# Altium PCB PCB2.PcbDoc
Units mil, origin at the board's own origin, x right, y up, seen from the top; angles counter-clockwise.
Board outline 3140 x 2285 mil, 2 copper layers (Top Layer, Bottom Layer); 24 components, 19 nets, 113 pads, 7 vias.
Unrouted connection lines stored in the file: 1.
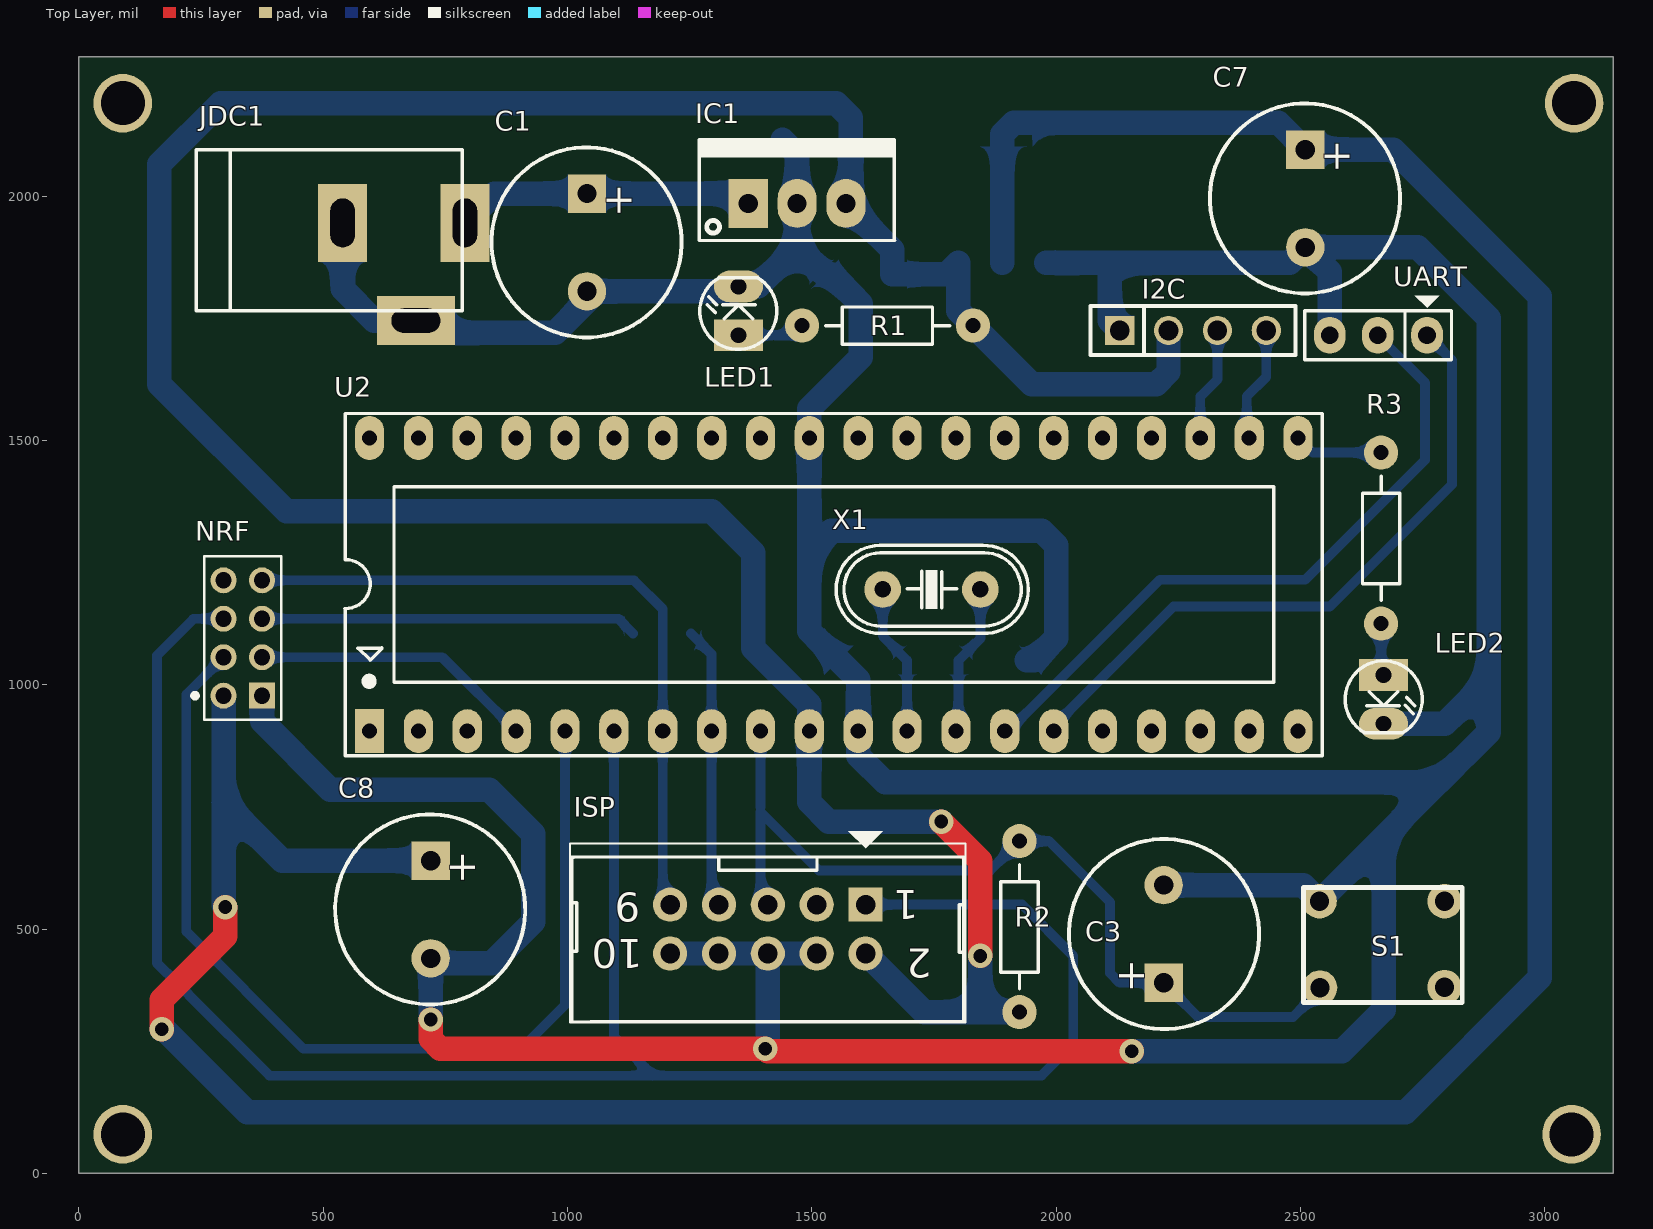
[diagram p0: Top Layer view]
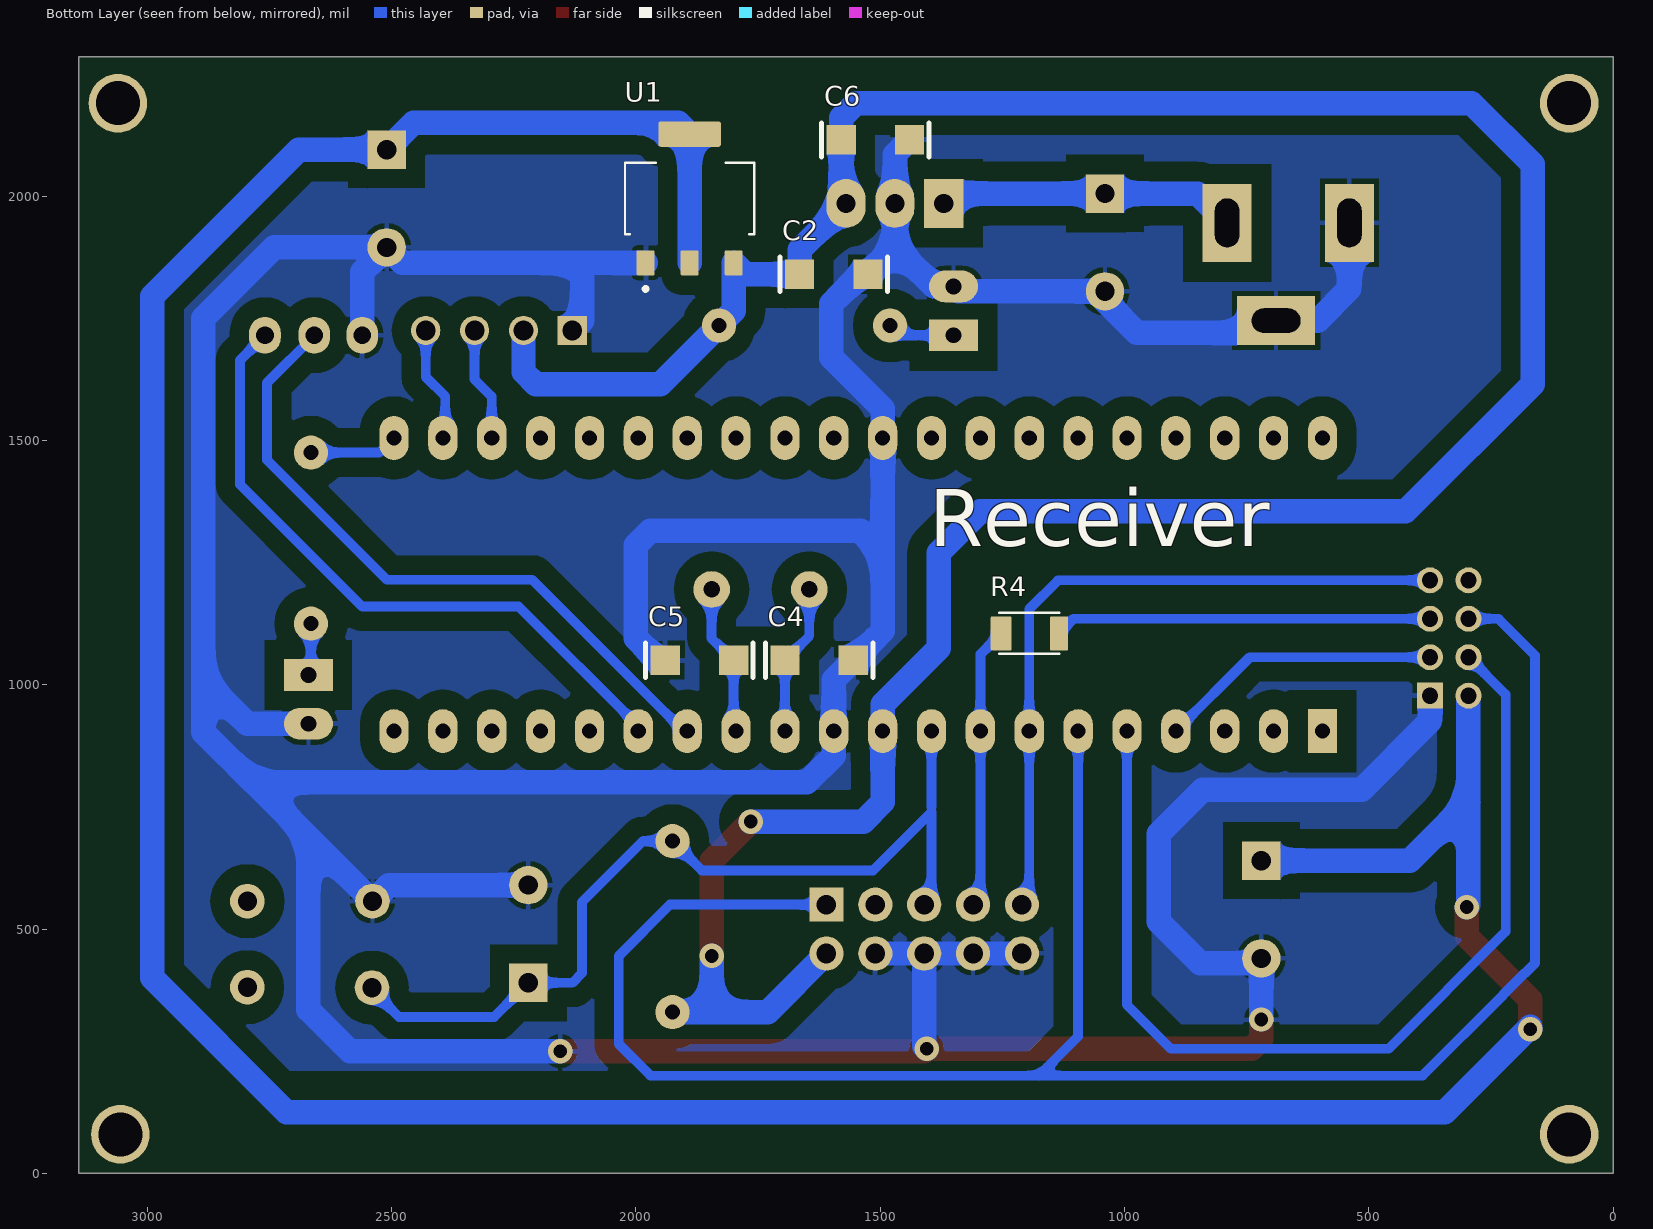
[diagram p1: Bottom Layer view, seen from below]
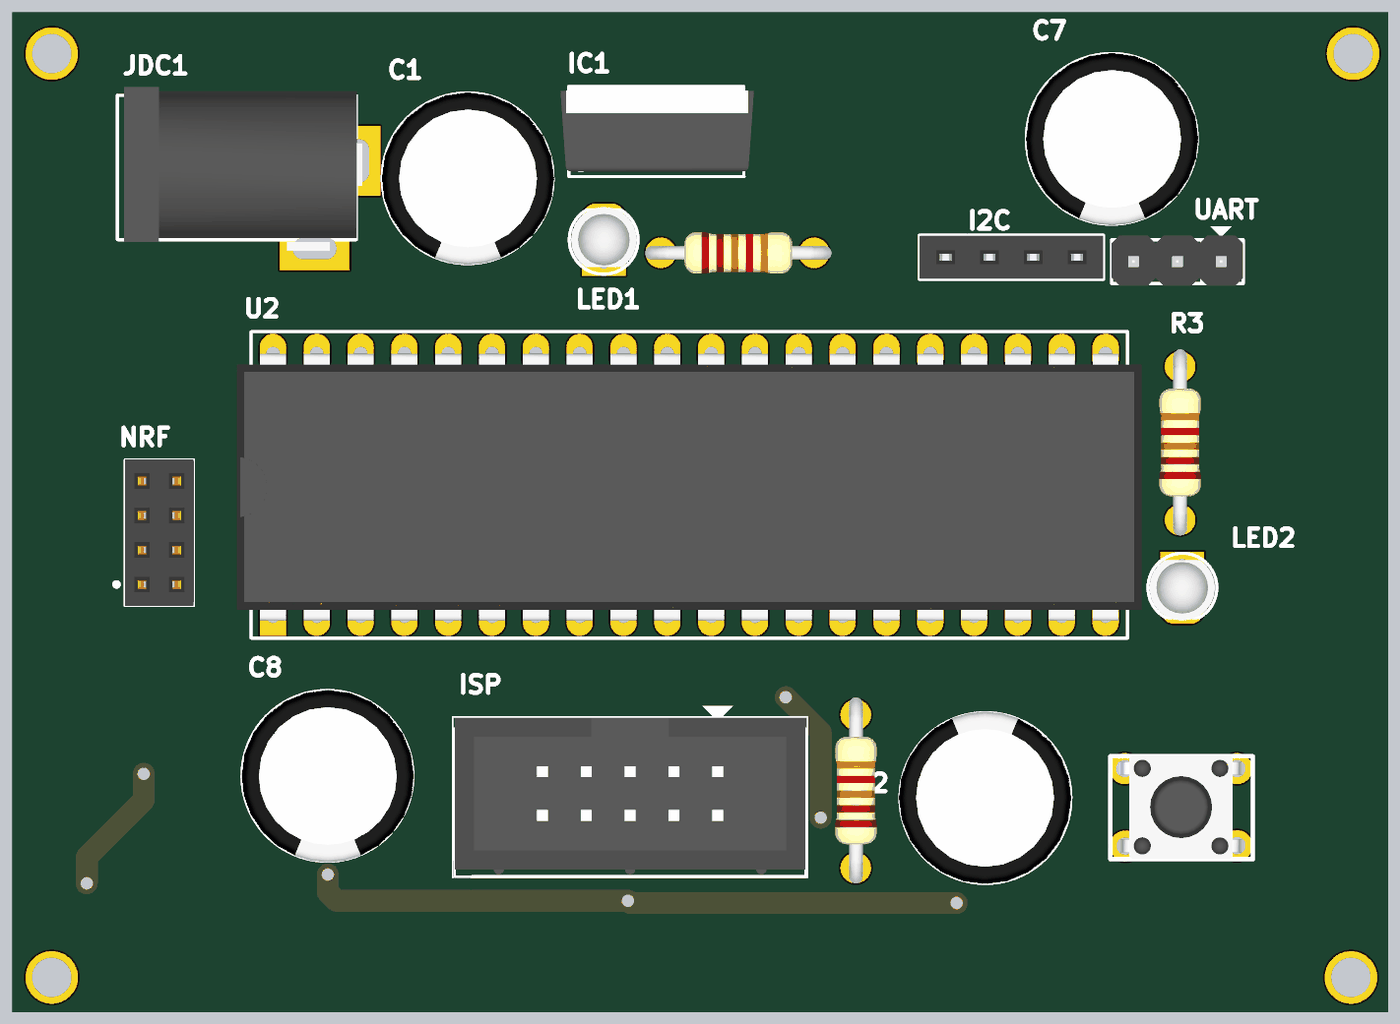
[diagram p2: 3D render of the assembled board from above, using the file's embedded part models]
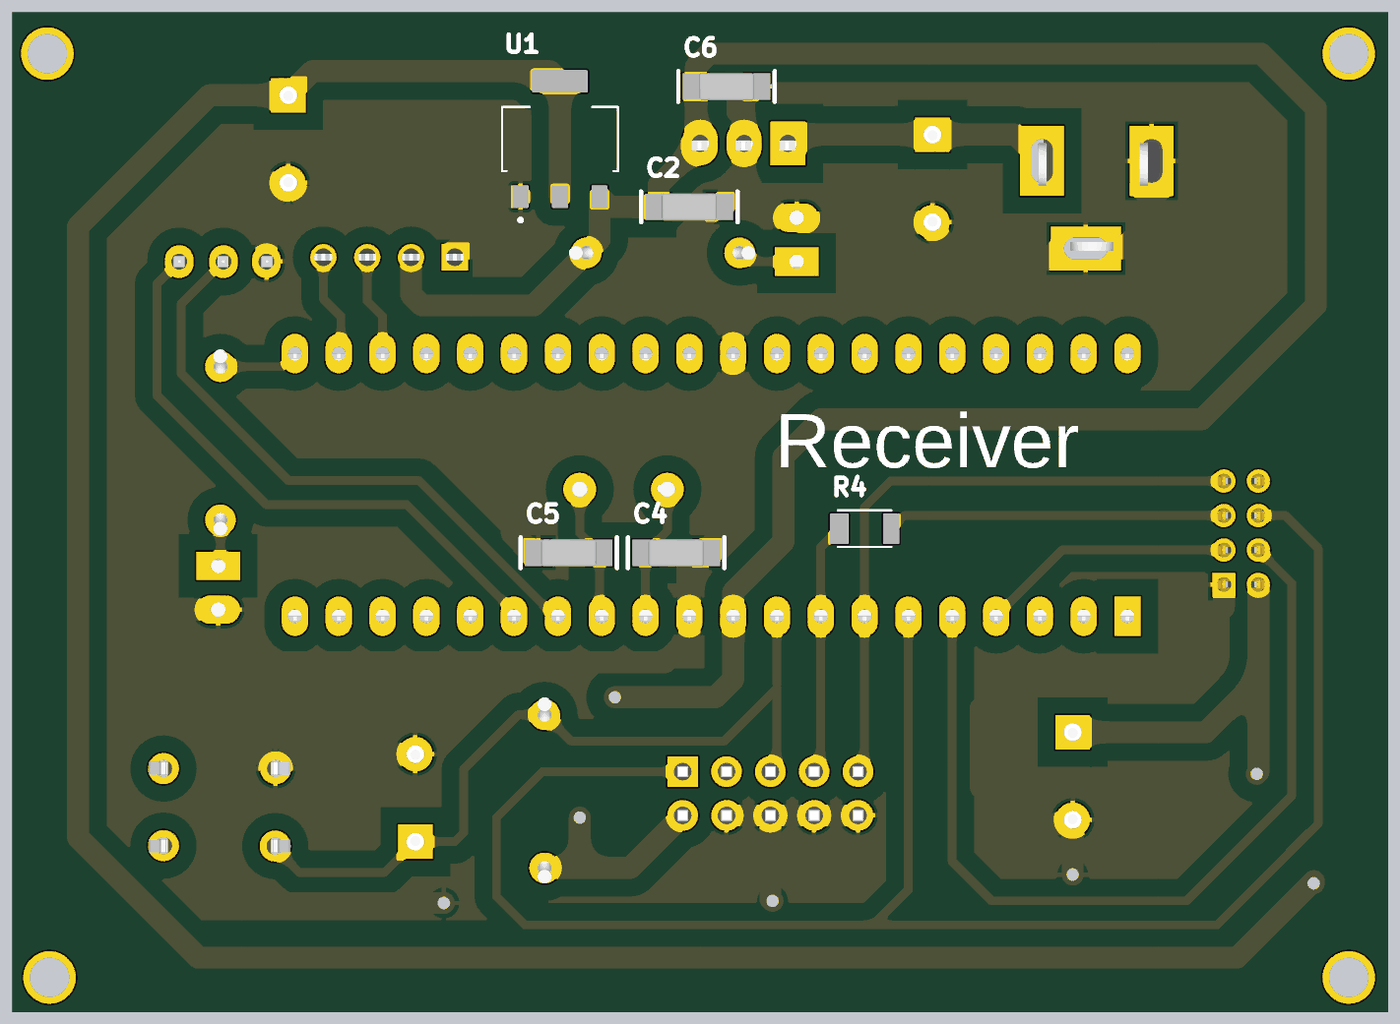
[diagram p3: 3D render of the assembled board from below, using the file's embedded part models]

## Layer stack, top to bottom
Top Solder: solder mask 0.4, Solder Resist, Dk 3.5
Top Layer: signal copper 1.4
Dielectric 1: dielectric 12.6, FR-4, Dk 4.8
Bottom Layer: signal copper 1.4
Bottom Solder: solder mask 0.4, Solder Resist, Dk 3.5

## Board outline
0,0 3140,0 3140,2285 0,2285

## Design rules (kind name [scope] priority, off if disabled: settings)
Clearance [All] p1: gap=40 ignorepadtopadclearanceinfootprint=FALSE
PolygonConnect [All] p1: connectstyle=Relief reliefconductorwidth=10 reliefentries=4 polygonreliefangle="90 Angle" airgapwidth=10
RoutingVias [All] p1: holewidth=20 width=35 viastyle="Through Hole" minholewidth=15 minwidth=25 maxholewidth=28 maxwidth=50
SolderMaskExpansion [All] p1: expansion=4
Width [All] p1: maxlimit=50 minlimit=10 preferedwidth=20
30 further rules are at their usual default settings.

## Classes and differential pairs
component class project: C1 C2 C3 C4 C5 C6 C7 C8 I2C IC1 ISP JDC1 LED1 NRF R1 R2 R3 R4 S1 U2 UART X1

## Components (designator, comment, footprint, x,y, rotation, side; value= is the part's Value field where it differs from the comment)
C1 "1000uF" C10mm 1040,1905 r270 top
C2 "0.1uF" C1206 1595,1840 r0 bottom
C3 "10uF" C10mm 2220,490 r90 top
C4 "22pF" C1206 1625,1050 r0 bottom
C5 "22pF" C1206 1870,1050 r0 bottom
C6 "0.1uF" C1206 1510,2115 r0 bottom
C7 "47uF" C10mm 2510,1995 r270 top
C8 "4.7uF" C10mm 720,540 r270 top
I2C "JP4" JP4-C1T 2130,1725 r0 top
IC1 "LM7805" QTO-220 1370,1985 r0 top
ISP "IDC 5x2" IDC10 1410,495 r180 top value="Header 5x2"
JDC1 "Jac DC" DC-IN 665,1845 r0 top
LED1 "LED" LED-3 1350,1715 r90 top value="LED 3 ly Single Colour"
LED2 "LED" LED-3 2670,1020 r270 top value="LED 3 ly Single Colour"
NRF "JP4x2-2.0" J4-C2T 335.63,1095.63 r90 top
R1 "1k" R1/4W 1830,1735 r180 top value="R1/4W - 1K"
R2 "330" R1/4W 1925,680 r270 top value="R1/4W - 1K"
R3 "330" R1/4W 2665,1475 r270 top value="R1/4W - 1K"
R4 "4-1879497-4" RESC3115X65N 1195,1105 r180 bottom
S1 "SW-4P-S" SW-4P-S 2795,381 r180 top
U1 "AMS1117" SOT229P700X180-4N 1890,1995 r90 bottom
U2 "ATmega32A-PU" DIP40/W0.6 595,905 r0 top
UART "Jumper 3" JP3 2659,1715 r180 top value=J3
X1 "16Mhz" XT2 1745,1195 r180 top value=4Mhz

## Footprints (in the part's own frame and the unit in brackets; to place one, negate y for a bottom-side part, rotate by r counter-clockwise, add the part's x,y. Pads: shape width x height; smd on the part's side, far side on the other; paste and mask are expansions set on the pad)
C10mm [mm]
  rect 2x2 hole 1: 1(-2.54,0)
  round 2 hole 1: 2(2.54,0)
  silkscreen extent -4.95,-4.96 4.93,4.92, body extent -5,-5 4.97,5, height 20.01
C1206 [mil]
  rect 60x60 smd: 1(-70,0) 2(70,0)
  silkscreen extent -110,-35 110,35, body extent -63,-35 63,35, height 40
DC-IN [mil] "Jac DC input"
  rect 100x160 hole 50 slot 100 at 90 deg: 1(125,100) 2(-125,100)
  rect 160x100 hole 50 slot 100 at 0 deg: 3(25,-100)
  silkscreen extent -425,-80 120,250, body extent -410,-105 134,269, height 434
DIP40/W0.6 [mil] "40 PIN, W 600mil, Pin to pin 100mil"
  rect 60x90 hole 31: 1(0,0)
  oval 60x90 hole 31: 2(100,0) 3(200,0) 4(300,0) 5(400,0) 6(500,0) 7(600,0) 8(700,0) 9(800,0) 10(900,0) 11(1000,0) 12(1100,0) 13(1200,0) 14(1300,0) 15(1400,0) 16(1500,0) 17(1600,0) 18(1700,0) 19(1800,0) 20(1900,0) 21(1900,600) 22(1800,600) 23(1700,600) 24(1600,600) 25(1500,600) 26(1400,600) 27(1300,600) 28(1200,600) 29(1100,600) 30(1000,600) 31(900,600) 32(800,600) 33(700,600) 34(600,600) 35(500,600) 36(400,600) 37(300,600) 38(200,600) 39(100,600) 40(0,600)
  silkscreen extent -50,-50 1950,650, body extent -82,-10 1982,600, height 224
IDC10 [mil]
  rect 70x70 hole 40: 1(-200,-55)
  round 70 hole 40: 2(-200,45) 3(-100,-55) 4(-100,45) 5(0,-55) 6(0,45) 7(100,-55) 8(100,45) 9(200,-55) 10(200,45)
  silkscreen extent -405,-205 405,186, body extent -400,-178 400,180, height 366
J4-C2T [mm] "8 pins, dual row, straight, gold plating"
  rect 1.35x1.35 hole 0.85: 1(-3,-1)
  round 1.35 hole 0.85: 2(-1,-1) 3(1,-1) 4(3,-1) 5(3,1) 6(1,1) 7(-1,1) 8(-3,1)
  silkscreen extent -4.25,-2 4.25,2.61, body extent -4.25,-2 4.25,2, height 4.31
JP3 [mil] "Jumper 3"
  oval 65x75 hole 36: 1(-100,0) 2(1,0) 3(99,0)
  silkscreen extent -150,-81 150,50, body extent -150,-60 150,55, height 355
JP4-C1T [mm] "4 row, straight, gold plating"
  rect 1.52x1.52 hole 1.02: 1(0,0)
  round 1.52 hole 1.02: 2(2.54,0) 3(5.08,0) 4(7.62,0)
  silkscreen extent -1.52,-1.27 9.14,1.27, body extent -1.52,-1.25 9.14,1.25, height 8.51
LED-3 [mil] "LED 2 PIN, 3ly Only colour"
  rect 65x100 hole 32: 1(0,0)
  oval 65x100 hole 32: 2(100,0)
  silkscreen extent -29,-78 118,79, body extent -13,-75 125,75, height 217
QTO-220 [mil] "TO-220 - 1-2-3"
  rect 80x100 hole 39: 1(0,0)
  oval 80x100 hole 39: 2(100,0) 3(200,0)
  silkscreen extent -100,-76 300,130, body extent -119,-64 322,121, height 755
R1/4W [mil] "R 1/4W, 2 Pin, 350mil"
  round 70 hole 31: 1(0,0) 2(350,0)
  silkscreen extent 48,-38 302,38, body extent -40,-47 386,47, height 111
RESC3115X65N [mm]
  rrect14% 1.09x1.77 smd: 1(-1.465,0)
  rrect14% 0.94x1.77 smd: 2(1.54,0)
  silkscreen extent -1.55,-1.06 1.55,1.06
SOT229P700X180-4N [mm]
  rrect15% 1.31x0.93 smd: 1(-3.345,2.29) 2(-3.345,0) 3(-3.345,-2.29)
  rrect15% 1.31x3.24 smd: 4(3.345,0)
  silkscreen extent -4.8,-3.36 1.86,3.36
SW-4P-S [mm]
  round 1.8 hole 1: 1(0,0) 2(0,-4.47) 3(6.502,-4.47) 4(6.477,0.025)
  silkscreen extent -0.91,-5.18 7.34,0.79, body extent -0.86,-5.23 7.35,0.76, height 9.52
XT2 [mil] "Footpin for Crystal 2 pin"
  round 75 hole 34: 1(-100,0) 2(100,0)
  silkscreen extent -198,-90 195,90, body extent -233,-93 213,90, height 138

## Part data
C1 C3 C7 C8: library part "Cap Pol 8mm", "Polarized Capacitor (Axial)", LatestRevisionDate=17-Jul-2002, LatestRevisionNote="Re-released for DXP Platform.", PackageReference=POLAR0.8, Published=8-Jun-2000, Publisher="Altium Limited"
C2 C4 C5 C6: library part "Cap SMD 1206"
I2C: "WR-PHD 2.54 mm Angled Socket Header", Manufacturer="Würth Elektronik eiSos GmbH", partNo=613004143121, ComponentLink1 Description=Manufacturer, ComponentLink1URL=http://www.we-online.com, ComponentLink2 Description=Datasheet, ComponentLink2URL=http://katalog.we-online.de/em/datasheet/6130xx143121.pdf, Created by="Karrer Zheng", Created Date="29 March 2013", NoPins=04
IC1: library part LM78xx, "On ap +, from + 5 to + 24VDC", =LM7808
ISP: library part "IDC 5X2"
JDC1: library part DCIN, "Jac DC input"
LED1 LED2: "LED Single colour Green and Red"
NRF: "WR-PHD 2.00 mm Dual Pin Header", Manufacturer="Würth Elektronik eiSos GmbH", partNo=62000821121, ComponentLink1 Description=Manufacturer, ComponentLink1URL=http://www.we-online.com, ComponentLink2 Description=Datasheet, ComponentLink2URL=http://katalog.we-online.de/em/datasheet/6200xx21121.pdf, Created by="Karrer Zheng", Created Date="2 April 2013", NoPins=08
R1 R2 R3: library part R1/4W, "Resistor 1/4W"
R4: "CRGH1206 5% 62R 0.5W", Package=None, Availability=Unavailable, MP=4-1879497-4, Price=None
S1: library part SW-4PIN-SMALL, "Switch Small 4 Pin", LatestRevisionDate=17-Jul-2002, LatestRevisionNote="Re-released for DXP Platform.", PackageReference=SPST-2, Published=24-Mar-1999, Publisher="Altium Limited"
U1: "UNO PLUS Arduino R3 Shield, Xbee Arduino IDE Wheeled Robotics Kit", Package="SOT-223 Seeed Technology", Availability=Unavailable, MF="Seeed Technology", MP=AMS1117, Price=None, SnapEDA_Link=https://www.snapeda.com/parts/AMS1117/Seeed%20Technology%20Co.%2C%20Ltd/view-part/184428/?ref=snap
U2: "8-Bit AVR Microcontroller with 32K Bytes of In-System Programmable Flash Memory", Supplier Part Number 1=ATMEGA32-16PC-ND, Code_JEDEC=MS-011-AC, ComponentLink1Description=Datasheet, ComponentLink1URL=http://www.atmel.com/dyn/resources/prod_documents/doc2503.pdf, ComponentLink2Description="Atmel.com Home", ComponentLink2URL=http://www.atmel.com, DatasheetVersion=2503C-AVR-10/02, PackageDescription="40-lead (0.600\"/15.24mm Wide) Plastic Dual Inline Package (PDIP)", PackageReference=40P6, PackageVersion="revB, Sep-2001", Published=17-Sep-2003, Publisher="Altium Limited", Supplier 1=Digi-Key, Supplier 2=Mouser, Supplier Part Number 2=556-ATMEGA32-16PC
UART: library part JP3
X1: library part XT2, "Crystal For all Crystal 2pin."

## Free pads (board coordinates)
  round 120 hole 90: 3(90,80) 3(90,2190) 3(3055,80) 3(3060,2190)

## Via types
v1: diameter 50, hole 28, Top Layer to Bottom Layer, tented both sides, 7 vias

## Nets (pads, with @x,y where several pads share a name; then routed paths per layer and width w, separated by ;. In a path a pad name is that pad's centre, name@x,y a point inside that pad or via, vN(x,y) a via of type N, cw(c..) or ccw(c..) an arc to the next point about the centre after c; other vN are vias at no path point)
+3.3V: C7.1 C8.1 NRF.8 U1.2 U1.4 | length 7137.8
  Top Layer w50: v1(170,295) 170,355 300,485 v1(300,545)
  Bottom Layer w50: v1(170,295) 170,300 345,125 2715,125 2990,400 2990,1795 2690,2095 C7.1 2455,2150 1913.31,2150 U1.4 U1.2 ; NRF.8 296.26,760 ; v1(300,545) 296.26,548.74 296.26,760 ; C8.1 416.26,640 296.26,760
+5V: C2.2 C6.2 I2C.2 IC1.3 ISP.2 R1.1 R2.2 U1.3 U2.10 | length 6113
  Top Layer w50: v1(1765,720) 1845,640 v1(1845,445)
  Bottom Layer w50: ISP.2 1730,330 1845,330 ; v1(1765,720) 1535,720 1495,760 U2.10 1495,960 1380,1075 1380,1270 1295,1355 425,1355 165,1615 165,2065 290,2190 1550,2190 1580,2160 C6.2 1580,1995 IC1.3 1665,1890 C2.2 1776.54,1840 U1.3 1799.84,1765.16 R1.1 1950,1615 2205,1615 2230,1640 I2C.2 ; v1(1845,445) 1845,330 ; R2.2 1845,330
CE: NRF.2 U2.4 | length 582.7
  Bottom Layer w20: NRF.2 743.74,1056.26 U2.4
CSN: NRF.7 U2.5 | length 2064.5
  Bottom Layer w20: NRF.7 220,980 220,495 460,255 905,255 995,345 U2.5
GND: C1.2 C2.1 C3.2 C4.1 C5.2 C6.1 C7.2 C8.2 I2C.1 IC1.2 ISP.4 ISP.6 ISP.8 ISP.10 JDC1.2 JDC1.3 LED1.2 LED2.2 NRF.1 S1.3 U1.1 U2.11 U2.31 UART.3 | length 12020.8
  Top Layer w50: v1(720,315) 720,275 740,255 v1(1405,255) 1410,250 v1(2155,250)
  Bottom Layer w50: NRF.1 375,925 515,785 840,785 930,695 930,515 845,430 730,430 C8.2 v1(720,315) ; JDC1.2 540,1810 605,1745 JDC1.3 715,1720 975,1720 1040,1785 C1.2 1340,1805 LED1.2 1390,1815 1470,1895 ; ISP.10 ISP.8 ISP.6 ; v1(1405,255) 1410,260 ISP.6 ; C6.1 1470,2085 IC1.2 1470,1895 ; ISP.4 ISP.6 ; C5.2 1955,1050 2000,1095 2000,1285.16 1970.16,1315 1540,1315 1495,1270 ; U1.1 2135,1863.31 ; I2C.1 2110,1745 2110,1838.31 2135,1863.31 ; v1(2155,250) 2585,250 2670,335 2670,688 ; C3.2 2506,590 S1.3 2670,688 ; UART.3 2560,1845 C7.2 ; LED2.2 2795,920 2885,1010 ; 1470,1895 C2.1 1540,1840 1600,1780 1600,1670 1495,1565 U2.31 1495,1270 ; 1495,1270 1495,1110 C4.1 1595,1010 U2.11 1595,855 1650,800 2782,800 ; 2135,1863.31 2478.31,1863.31 C7.2 ; C7.2 2740,1895 2885,1750 2885,1010 ; 2670,688 2782,800 ; 2782,800 2885,903 2885,1010
Led: R3.1 U2.21 | length 182.4
  Bottom Layer w20: U2.21 2525,1475 R3.1
MISO: ISP.9 NRF.4 U2.7 | length 1455.5
  Bottom Layer w20: NRF.4 1136.26,1213.74 1195,1155 U2.7 1195,565 ISP.9
MOSI: ISP.1 NRF.6 U2.6 | length 4181.8
  Bottom Layer w20: NRF.6 235,1135 229.64,1129.64 160,1060 160,430 180,410 181.07,410 225,366.07 225,365 390,200 1175,200 ; U2.6 1095,280 1175,200 ; ISP.1 1930,550 2035,445 2035,265 1970,200 1175,200
NetC1_1: C1.1 IC1.1 JDC1.1 | length 613.1
  Bottom Layer w50: JDC1.1 850,2005 C1.1 1350,2005 IC1.1
NetLED1_1: LED1.1 R1.2 | length 138.3
  Bottom Layer w20: LED1.1 1460,1715 R1.2
NetLED2_1: LED2.1 R3.2 | length 107.1
  Bottom Layer w20: R3.2 2665,1025 LED2.1
RESET: C3.1 ISP.5 R2.1 S1.4 U2.9 | length 1832.6
  Bottom Layer w20: 1395,750 U2.9 ; ISP.5 1395,565 1395,740 1515,620 1865,620 R2.1 1985,680 2110,555 2110,410 2130,390 C3.1 2290,320 2485,320 2540,375 S1.4
RXD: U2.14 UART.2 | length 1385.1
  Bottom Layer w20: U2.14 1902.48,905 2212.48,1215 2510,1215 2755,1460 2755,1618 UART.2
SCK: ISP.7 NRF.3 R4.1 R4.2 U2.8 | length 1350.5
  Bottom Layer w20: NRF.3 1104.37,1135 R4.2 ; R4.1 1295,1062.68 U2.8 1295,565 ISP.7
SCL: I2C.4 U2.22 | length 238.6
  Bottom Layer w20: U2.22 2390,1510 2390,1590 2430,1630 I2C.4
SDA: I2C.3 U2.23 | length 234.5
  Bottom Layer w20: U2.23 2295,1590 2330,1625 I2C.3
TXD: U2.15 UART.1 | length 1356.2
  Bottom Layer w20: U2.15 1995,915 2240,1160 2560,1160 2810,1410 2810,1664 UART.1
XTAL1: C5.1 U2.13 X1.1 | length 310.7
  Bottom Layer w20: U2.13 1800,910 C5.1 1845,1095 X1.1
XTAL2: C4.2 U2.12 X1.2 | length 310.7
  Bottom Layer w20: X1.2 1645,1100 C4.2 U2.12
pads on no net: ISP.3 NRF.5 S1.1 S1.2 U2.1 U2.2 U2.3 U2.16 U2.17 U2.18 U2.19 U2.20 U2.24 U2.25 U2.26 U2.27 U2.28 U2.29 U2.30 U2.32 U2.33 U2.34 U2.35 U2.36 U2.37 U2.38 U2.39 U2.40

## Polygon pours and split planes (outlines as drawn)
GND on Bottom Layer "GND_L02_P008" (solid, remove dead copper, pour order 8): 0,2285 0,0 3140,0 3140,2285
GND on Bottom Layer "GND_L02_P004" (solid, remove dead copper, pour order 4): 2245,2575
GND on Top Layer "GND_L01_P012" (hatched Horizontal grid 20 track 8, remove dead copper, pour order 12): 0,2285

## Silkscreen, mask and mechanical layers (free items; w line width, h text height)
Bottom Overlay:
  text "Receiver" at 1400,1245 h200
Drill Drawing:
  lines w10: 0,0 0,2285 40,2285 3140,2285 3140,0 0,0

## Text inside footprints (layer, text, board x,y; h text height)
C1: Top Overlay "+" at 1080,2025 h60 r270
C3: Top Overlay "+" at 2180,370 h60 r90
C7: Top Overlay "+" at 2550,2115 h60 r270
C8: Top Overlay "+" at 760,660 h60 r270
ISP: Top Overlay "1" at 1719.25,579.53 h60 r180; Top Overlay "2" at 1745,460 h60 r180; Top Overlay "9" at 1149,574 h60 r180; Top Overlay "10" at 1154,479 h60 r180